# EAGLE board Fuel_Cell_Controller (EAGLE 9.6.2)
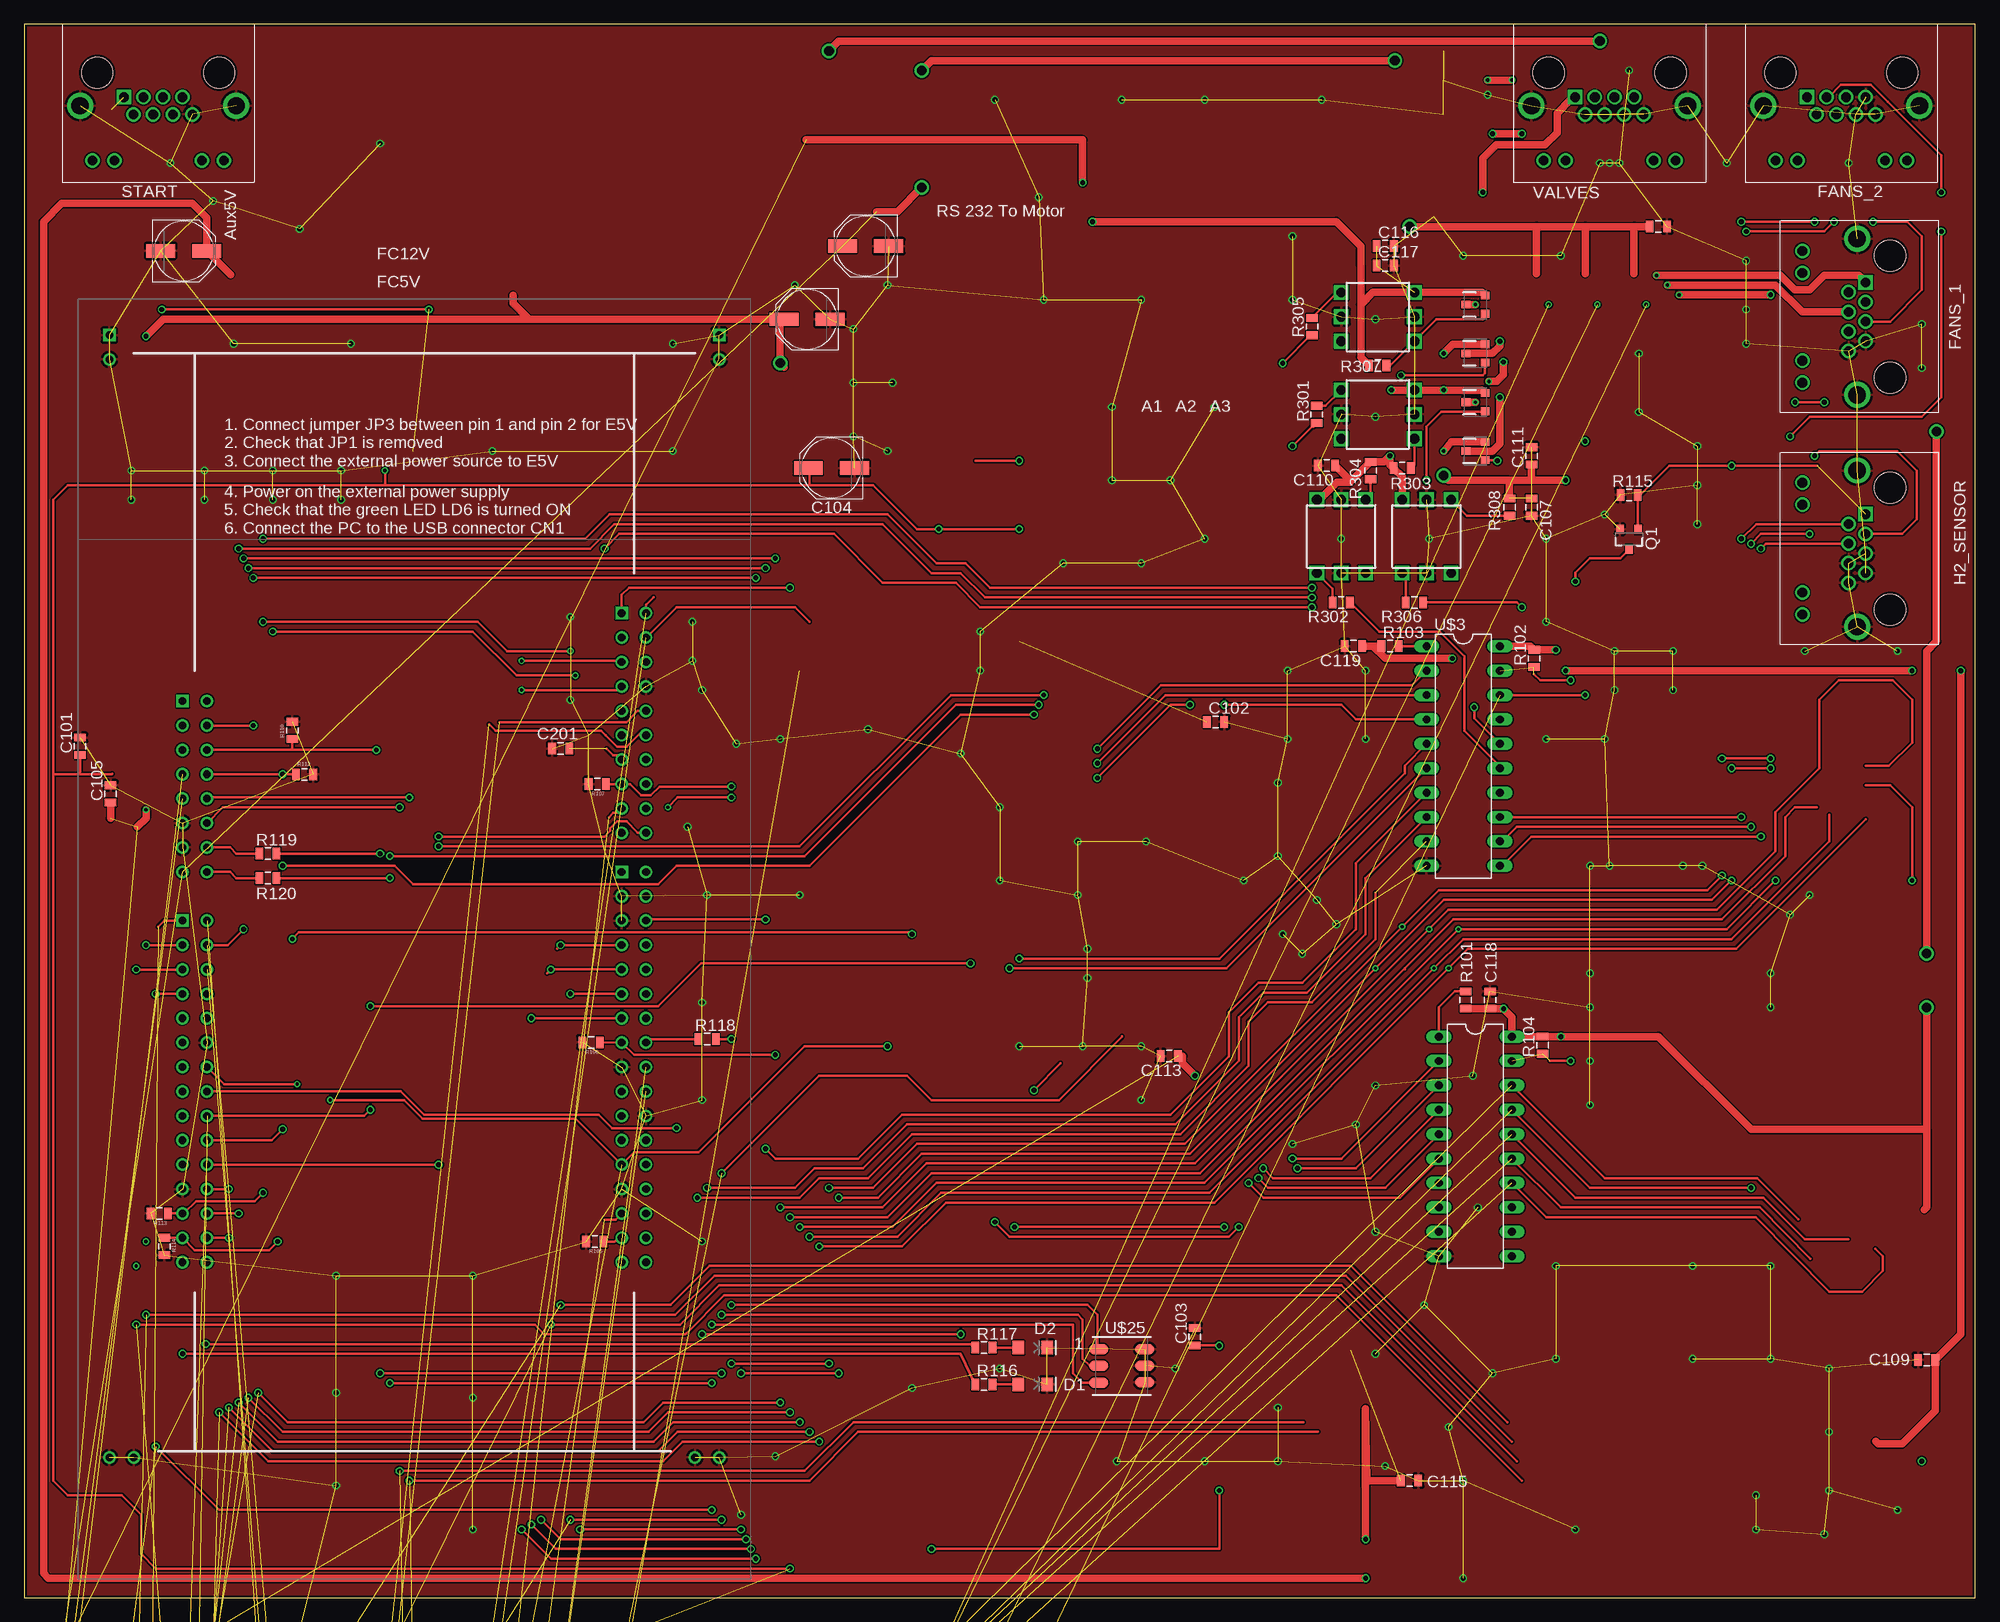
[diagram p0: board, top side]
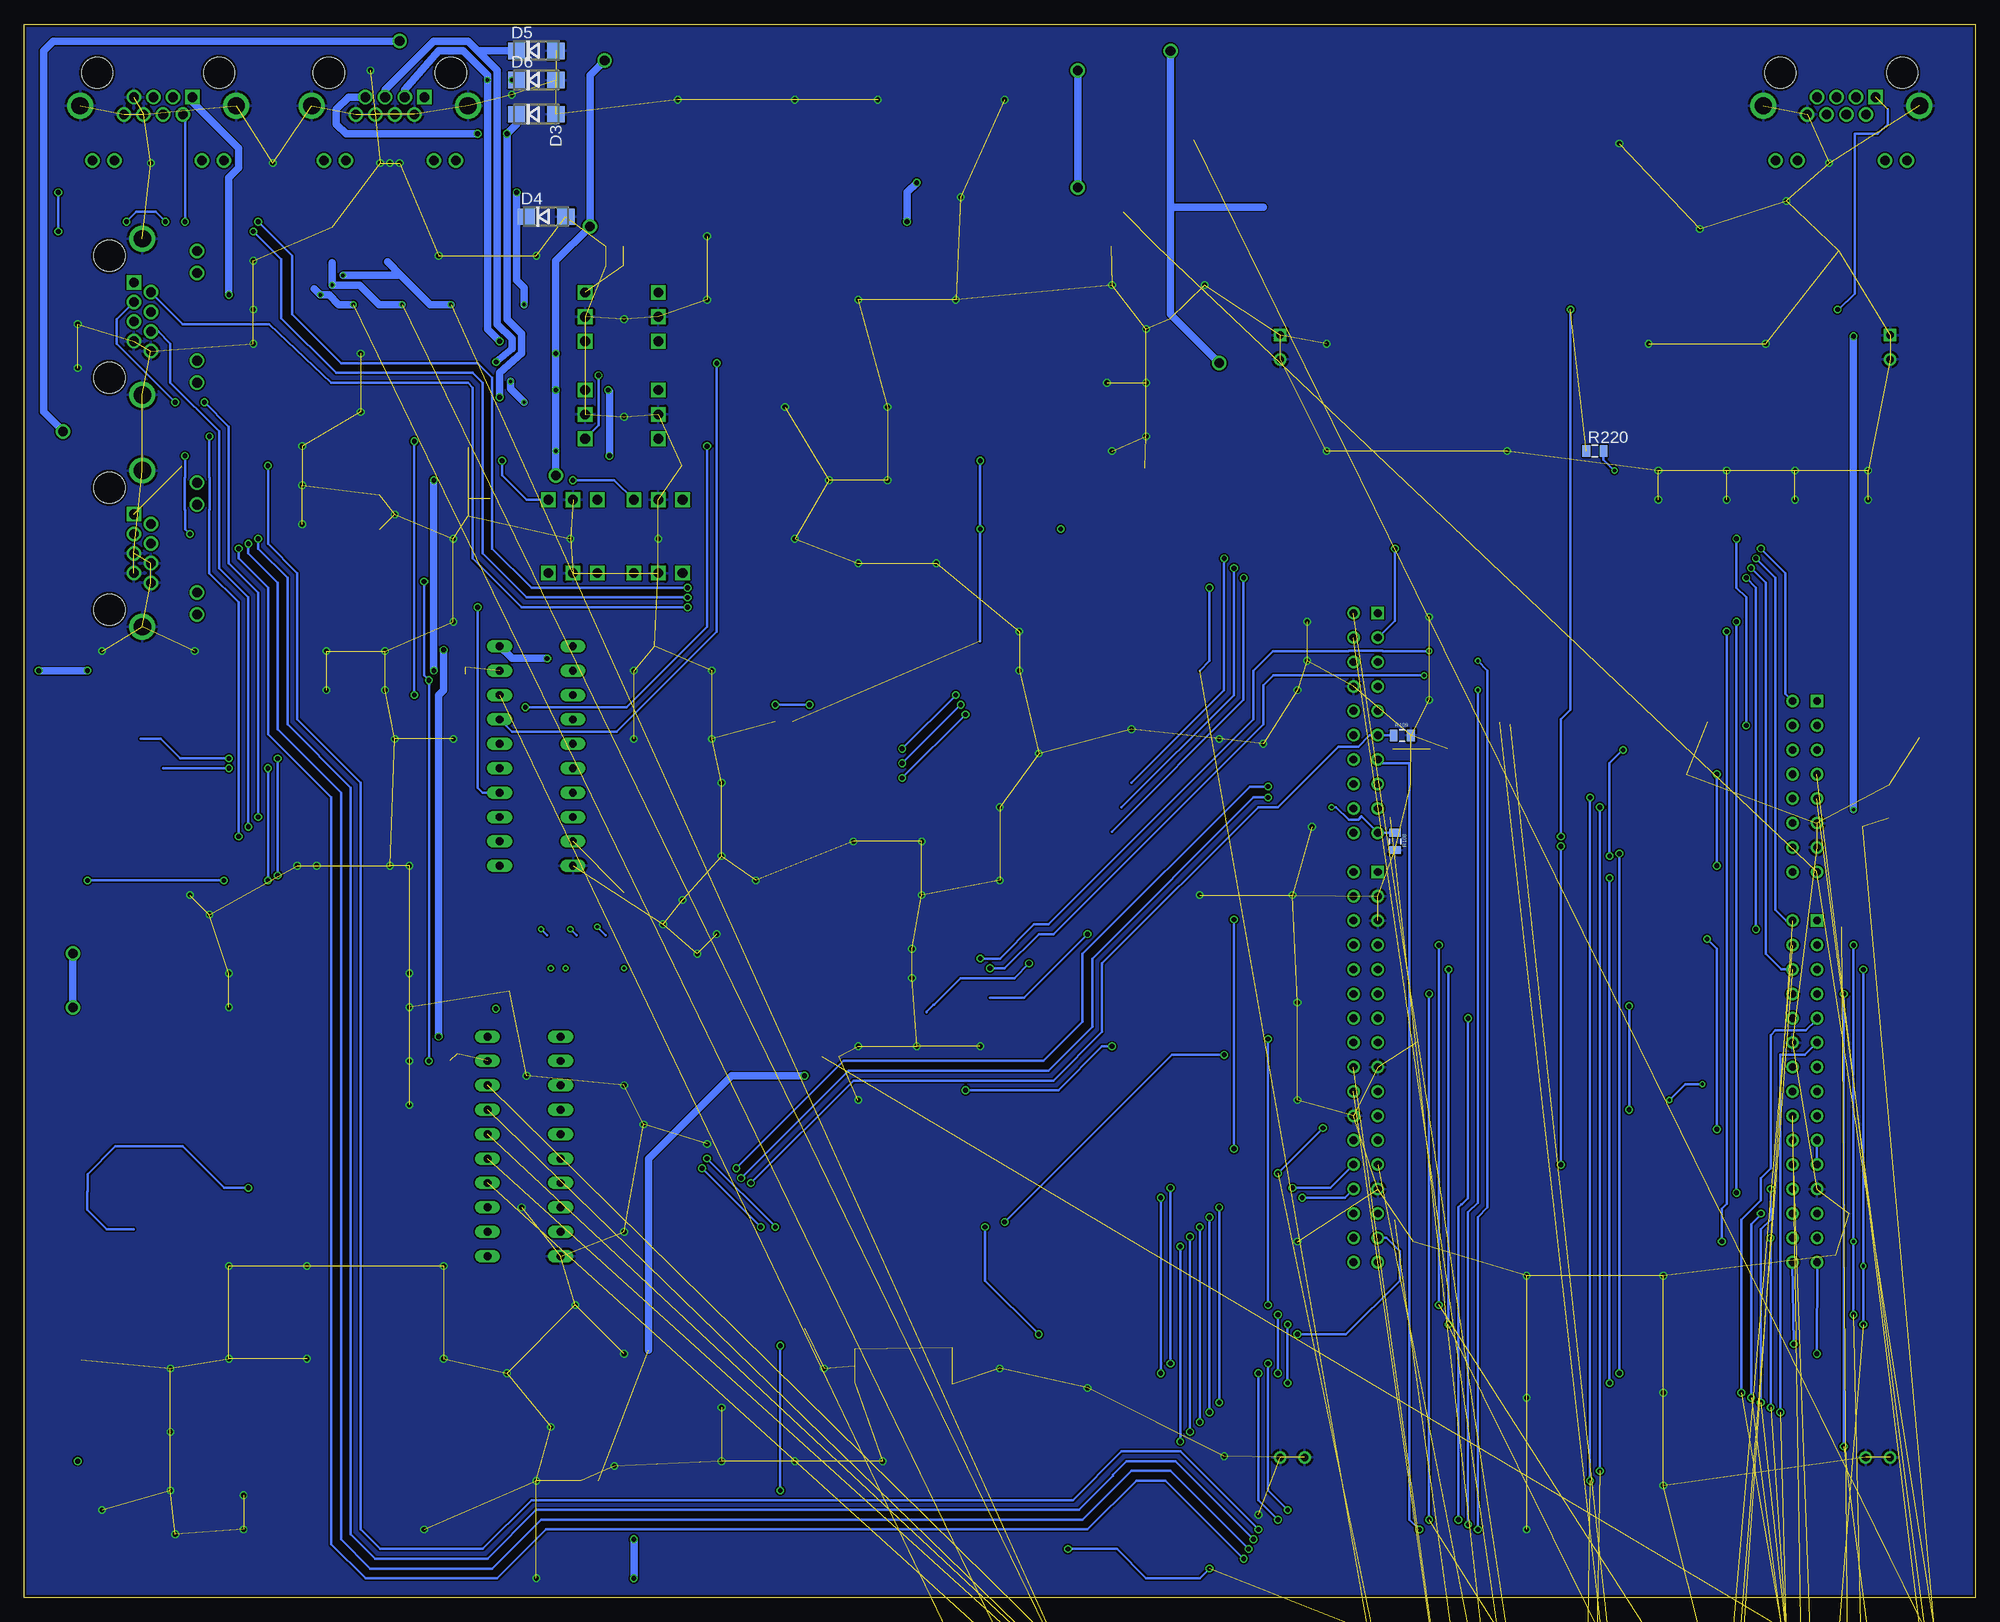
[diagram p1: board, bottom side, seen from below]

Size 203.2 x 163.83 mm. Coordinates in mm from the lower left corner, seen from the top.
Outline: 0,0 203.2,0 203.2,163.83 0,163.83 0,0
Copper layers (1+2+15+16): Top 0.035mm / dielectric 0.75mm / Route2 0.035mm / dielectric 0.75mm / Route15 0.035mm / dielectric 0.75mm / Bottom 0.035mm
Design rules "SeeedStudio_2layer_DRU_no_angle_20140221 *": minimum track width 6mil, minimum drill 12mil, track to track 6mil, track to pad 6mil, pad to pad 6mil, via to via 6mil, smd to smd 0mil, copper to edge 10mil, drill to drill 10mil, minimum pad ring 10mil, minimum via ring 6mil, stop-mask expansion 2mil, vias tented up to drill 100mil, thermal gap 10mil

## Footprints (pad centres in the part's own frame; a part is rotated, then mirrored left to right if it is on the bottom)
TE_6-PIN = drill 1.5 square: 1 4.14,11.48; 2 0,11.48; 3 -4.14,11.48; 4 4.14,7.34; 5 0,7.34; 6 -4.14,7.34 | hole 3.91: 0,0
0805 = smd 0.8 x 1.2: 1 -0.9,0; 2 0.9,0
PANASONIC_D = smd 3 x 1.4: + 2.4,0; - -2.4,0
A122645-ND = drill 1 square: P$1 3.58,2.54 | drill 1: P$2 2.56,4.32; P$3 1.54,2.54; P$4 0.52,4.32; P$5 -0.5,2.54; P$6 -1.52,4.32; P$7 -2.54,2.54; P$8 -3.56,4.32; P$9 -6.86,9.14; P$10 -4.57,9.14; P$11 4.57,9.14; P$12 6.86,9.14 | drill 1.8: P$13 -8.13,3.43; P$14 8.13,3.43 | hole 3.25: -6.35,0; 6.35,0
LED-1206 = smd 1.2 x 1.4: A -1.5,0; C 1.5,0
DO214AC = smd 1.8 x 1.7: A 2.05,0; C -2.05,0
SOT23 = smd 1 x 1.4: A1 -0.95,-1.1; A2 0.95,-1.1; C 0,1.1
DO-204AC = drill 0.95: ANODE 0,0; CATHODE 9.6,0
3,6-PAD = drill 3.6 pad 5.842: B3,6 0,0
SO16L = smd 0.66 x 2.032: 1 -4.445,-4.902; 2 -3.175,-4.902; 3 -1.905,-4.902; 4 -0.635,-4.902; 5 0.635,-4.902; 6 1.905,-4.902; 7 3.175,-4.902; 8 4.445,-4.902; 9 4.445,4.902; 10 3.175,4.902; 11 1.905,4.902; 12 0.635,4.902; 13 -0.635,4.902; 14 -1.905,4.902; 15 -3.175,4.902; 16 -4.445,4.902
1X06BLUETOOTH = drill 1.016 pad 1.88: 1 43.18,1.905; 2 43.18,4.445; 3 43.18,6.985; 4 43.18,9.525; 5 43.18,12.065; 6 43.18,14.605
JP1 = drill 0.914 long: 1 0,-1.27; 2 0,1.27
CHIP-LED0805 = smd 1.2 x 1.2: A 0,-1.05; C 0,1.05
DIL14 = drill 0.813 long: 1 -7.62,-3.81; 2 -5.08,-3.81; 3 -2.54,-3.81; 4 0,-3.81; 5 2.54,-3.81; 6 5.08,-3.81; 7 7.62,-3.81; 8 7.62,3.81; 9 5.08,3.81; 10 2.54,3.81; 11 0,3.81; 12 -2.54,3.81; 13 -5.08,3.81; 14 -7.62,3.81
SOT23-3 = smd 0.8 x 0.9: 1 -0.95,-1; 2 0.95,-1; 3 0,1.1
R0805 = smd 1.3 x 1.5: 1 -0.95,0; 2 0.95,0
0402 = smd 0.85 x 0.9: 1 -0.58,0; 2 0.58,0
1X07-SHT31-DIS = drill 1.016 long: 1 -7.62,0; 2 -5.08,0; 3 -2.54,0; 4 0,0; 5 2.54,0; 6 5.08,0; 7 7.62,0 | hole 2.54: -6.35,7.62; 6.35,7.62
NUCLEO-F746ZG = drill 0.8: 3V3 -24.13,17.151; 5V -24.13,14.611; AGND 21.59,4.451; AVDD1 24.13,28.835; GND1 -24.13,12.071; GND2 -24.13,9.531; GND4 -31.75,60.33; GND6 31.75,60.33; GND7 31.75,-53.969; GND8 29.21,-53.969; GND9 -29.21,-53.969; GND10 -31.75,-53.969; GND11 -24.13,-26.029; GND12 -21.59,-10.789; GND13 24.13,26.295; GND14 21.59,-13.329; GND15 21.59,-26.029; GND16 21.59,1.911; GND17 24.13,-18.409; IOREF -24.13,22.231; NC2 -24.13,-13.329; NRST -24.13,19.691; PA_0 21.59,-28.569; PA_4 21.59,13.595; PA_5 24.13,23.755; PA_6 24.13,21.215; PA_7A -24.13,-15.869; PA_7B 24.13,18.675; PA_15 21.59,23.755; PB_0 21.59,-31.109; PB_1 21.59,-0.629; PB_2 21.59,-10.789; PB_3 21.59,16.135; PB_4 21.59,11.055; PB_5 21.59,18.675; PB_6 21.59,-8.249; PB_8 24.13,33.915; PB_9 24.13,31.375; PB_10 24.13,-31.109; PB_11 24.13,-33.649; PB_12 21.59,26.295; PB_13 21.59,28.835; PB_15 21.59,31.375; PC_0 -24.13,-0.629; PC_2 21.59,-3.169; PC_3 -24.13,-3.169; PC_7 21.59,21.215; PC_8 -21.59,24.771; PC_9 -21.59,22.231; PC_10 -21.59,19.691; PC_11 -21.59,17.151; PC_12 -21.59,14.611; PD_0 -24.13,-28.569; PD_1 -24.13,-31.109; PD_2 -21.59,12.071; PD_3 -21.59,-8.249; PD_4 -21.59,-5.709; PD_5 -21.59,-3.169; PD_6 -21.59,-0.629; PD_7 -21.59,1.911; PD_11 21.59,-20.949; PD_12 21.59,-18.409; PD_13 21.59,-15.869; PD_14 24.13,16.135; PD_15 24.13,13.595; PE_0 21.59,-33.649; PE_2A -21.59,-13.329; PE_2B 21.59,-23.489; PE_3 -21.59,-23.489; PE_4 -21.59,-15.869; PE_5 -21.59,-18.409; PE_6 -21.59,-20.949; PE_7 24.13,-15.869; PE_8 24.13,-13.329; PE_9 24.13,4.451; PE_10 24.13,-20.949; PE_11 24.13,1.911; PE_12 24.13,-23.489; PE_13 24.13,-3.169; PE_14 24.13,-26.029; PE_15 24.13,-28.569; PF_2 -24.13,-18.409; PF_3 -24.13,-5.709; PF_4 21.59,-5.709; PF_5 -24.13,-8.249; PF_7 -21.59,-28.569; PF_8 -21.59,-26.029; PF_9 -21.59,-31.109; PF_10 -24.13,-10.789; PF_12 24.13,11.055; PF_13 24.13,6.991; PF_14 24.13,-0.629; PF_15 24.13,-5.709; PG_0 -24.13,-33.649; PG_1 -21.59,-33.649; PG_2 -21.59,9.531; PG_3 -21.59,6.991; PG_9 24.13,-10.789; PG_14 24.13,-8.249; PH_0 -24.13,-23.489; PH_1 -24.13,-20.949; VIN -24.13,6.991 | drill 0.8 square: AVDD2 21.59,6.991; GND3 -31.75,62.87; GND5 31.75,62.87; NC1 -24.13,24.771; PA_3 -24.13,1.911; PC_6 21.59,33.915
DIL20 = drill 0.813 long: 1 -11.43,-3.81; 2 -8.89,-3.81; 3 -6.35,-3.81; 4 -3.81,-3.81; 5 -1.27,-3.81; 6 1.27,-3.81; 7 3.81,-3.81; 8 6.35,-3.81; 9 8.89,-3.81; 10 11.43,-3.81; 11 11.43,3.81; 12 8.89,3.81; 13 6.35,3.81; 14 3.81,3.81; 15 1.27,3.81; 16 -1.27,3.81; 17 -3.81,3.81; 18 -6.35,3.81; 19 -8.89,3.81; 20 -11.43,3.81
OPENLOG = drill 0.8: P$1 -6.35,-8.255; P$2 -3.81,-8.255; P$3 -1.27,-8.255; P$4 1.27,-8.255; P$5 3.81,-8.255; P$6 6.35,-8.255
H11L1 = drill 1.016 square: 3 -3.81,-2.54; ANODE -3.81,2.54; CATHODE -3.81,0; GND 3.81,0; VCC 3.81,2.54; VO 3.81,-2.54
SOT143_AVAGO = smd 1 x 0.7: GND -0.75,-1 | smd 0.6 x 0.7: IO1 0.95,-1; IO3 -0.95,1; VDD 0.95,1
DMP3056L-7 = smd 0.8 x 0.9: D 0,1; G -0.95,-1; S 0.95,-1
5060BRG4 = smd 2 x 1.1: 1 2.4,-1.75; 2 2.4,0; 3 2.4,1.75; 4 -2.4,1.7; 5 -2.4,0; 6 -2.4,-1.75
1X08OLED = drill 1.016 long: P$1 -8.89,25.4; P$2 -6.35,25.4; P$3 -3.81,25.4; P$4 -1.27,25.4; P$5 1.27,25.4; P$6 3.81,25.4; P$7 6.35,25.4; P$8 8.89,25.4 | hole 2.54: -16.002,3.048; 16.002,3.048; 16.002,25.4; -16.002,25.4

## Placement (x,y rotation side)
AUX_PWR1  TE_6-PIN  [TE_6-PIN]  7.75,-130.05 0 top  (outside the outline)
C101  0.1µF  [0805]  5.84,88.65 90 top
C102  0.1µF  [0805]  124.08,91.19 0 top
C103  0.1µF  [0805]  121.92,27.18 90 top
C104  1µF  [PANASONIC_D]  84.07,117.6 180 top
C105  1µF  [0805]  9.02,83.69 90 top
C106  1µF  [PANASONIC_D]  81.53,133.1 180 top
C107  10µF  [0805]  156.97,113.54 270 top
C108  10µF  [0805]  170.18,142.75 0 top
C109  10µF  [0805]  198.12,24.77 180 top
C110  10µF  [0805]  135.64,117.86 180 top
C111  10µF  [0805]  156.97,118.87 90 top
C112  10µF  [PANASONIC_D]  87.63,140.72 180 top
C113  1µF  [0805]  119.25,56.39 180 top
C114  1µF  [PANASONIC_D]  16.64,140.21 0 top
C115  1µF  [0805]  144.27,12.19 0 top
C116  10µF  [0805]  141.73,140.72 0 top
C117  10µF  [0805]  141.73,138.68 0 top
C118  0.1µF  [0805]  152.65,62.23 90 top
C119  0.1µF  [0805]  138.43,99.06 180 top
C120  1µF  [0805]  1.27,-357.5 0 top  (outside the outline)
C121  1µF  [0805]  1.27,-360.93 0 top  (outside the outline)
C122  1µF  [0805]  1.27,-364.36 0 top  (outside the outline)
C201  1µF  [0805]  55.88,88.39 180 top
C301  [0805]  6.73,-318.01 0 top  (outside the outline)
C302  [0805]  3.94,-318.01 0 top  (outside the outline)
C303  [0805]  1.14,-318.01 0 top  (outside the outline)
C304  [0805]  8.76,-342.14 0 top  (outside the outline)
C305  [0805]  11.56,-342.14 0 top  (outside the outline)
C306  [0805]  14.35,-342.14 0 top  (outside the outline)
CAN  ETHERNET  [A122645-ND]  11.68,-379.6 0 top  (outside the outline)
D1  RED  [LED-1206]  105.03,22.23 0 top
D2  YELLOW  [LED-1206]  105.03,26.04 0 top
D3  [DO214AC]  149.86,154.43 0 bottom
D4  [DO214AC]  148.84,143.76 0 bottom
D5  [DO214AC]  149.86,161.04 0 bottom
D6  [DO214AC]  149.86,157.99 0 bottom
D201  [DO214AC]  13.59,-197.1 0 top  (outside the outline)
D202  [DO214AC]  2.92,-202.44 0 top  (outside the outline)
D203  [DO214AC]  9.14,-202.44 0 top  (outside the outline)
D301  641-1198-1-ND  [SOT23]  28.45,-291.97 0 top  (outside the outline)
D302  641-1198-1-ND  [SOT23]  41.78,-291.97 0 top  (outside the outline)
D303  P6KE15A-E3/54GICT-ND  [DO-204AC]  19.81,-299.08 0 top  (outside the outline)
FANS_1  ETHERNET  [A122645-ND]  194.31,133.35 90 top
FANS_2  ETHERNET  [A122645-ND]  189.23,158.75 180 top
FC_PWR1  TE_6-PIN  [TE_6-PIN]  7.75,-152.53 0 top  (outside the outline)
H2_SENSOR  ETHERNET  [A122645-ND]  194.31,109.22 90 top
H9  MOUNT-PAD-ROUND3.6  [3,6-PAD]  22.1,-277.5 0 top  (outside the outline)
H10  MOUNT-PAD-ROUND3.6  [3,6-PAD]  30.86,-277.5 0 top  (outside the outline)
H11  MOUNT-PAD-ROUND3.6  [3,6-PAD]  39.62,-277.5 0 top  (outside the outline)
H12  MOUNT-PAD-ROUND3.6  [3,6-PAD]  48.39,-277.5 0 top  (outside the outline)
H13  MOUNT-PAD-ROUND3.6  [3,6-PAD]  57.15,-277.5 0 top  (outside the outline)
H14  MOUNT-PAD-ROUND3.6  [3,6-PAD]  4.06,-292.74 0 top  (outside the outline)
H15  MOUNT-PAD-ROUND3.6  [3,6-PAD]  12.83,-292.74 0 top  (outside the outline)
H16  MOUNT-PAD-ROUND3.6  [3,6-PAD]  21.59,-292.74 0 top  (outside the outline)
IC1  MAX232ECWE  [SO16L]  7.11,-350.01 0 top  (outside the outline)
J2  BLUETOOTH  [1X06BLUETOOTH]  0.76,-272.03 0 top  (outside the outline)
JP1  [JP1]  3.17,-8.76 0 top  (outside the outline)
JP2  [JP1]  3.17,-14.48 0 top  (outside the outline)
JP3  [JP1]  3.17,-20.19 0 top  (outside the outline)
JP4  [JP1]  3.17,-25.91 0 top  (outside the outline)
LED1  [CHIP-LED0805]  31.5,-143.89 0 top  (outside the outline)
LED2  [CHIP-LED0805]  27.3,-144.91 0 top  (outside the outline)
LED3  [CHIP-LED0805]  23.11,-145.16 0 top  (outside the outline)
LED4  [CHIP-LED0805]  18.92,-146.18 0 top  (outside the outline)
LP_FILTER_OP_AMP1  TLV2404TLV2404  [DIL14]  10.79,-335.41 0 top  (outside the outline)
PRESSURE1  ETHERNET  [A122645-ND]  11.68,-42.29 0 top  (outside the outline)
Q1  5.8A/30V/35mΩ  [SOT23-3]  167.13,110.24 180 top
R29  10kΩ  [0805]  1.27,-204.98 0 top  (outside the outline)
R101  1kΩ  [0805]  150.11,62.23 90 top
R102  10kΩ  [0805]  157.23,97.79 90 top
R103  1kΩ  [0805]  142.24,99.06 0 top
R104  10kΩ  [0805]  158.12,57.53 90 top
R105  10kΩ  [0805]  59.44,37.08 180 top
R106  10kΩ  [0805]  59.04,57.81 180 top
R107  10kΩ  [0805]  59.69,84.71 180 top
R108  10kΩ  [0805]  60.45,78.74 270 bottom
R109  10kΩ  [0805]  59.69,89.79 0 bottom
R110  10kΩ  [0805]  27.94,90.3 90 top
R112  10kΩ  [0805]  29.21,85.72 0 top
R113  10kΩ  [0805]  14.1,40.01 180 top
R114  10kΩ  [0805]  14.61,36.58 270 top
R115  10kΩ  [0805]  167.13,114.81 0 top
R116  324Ω  [0805]  99.95,22.23 0 top
R117  324Ω  [0805]  99.95,26.04 0 top
R118  324Ω  [0805]  71.12,58.17 0 top
R119  324Ω  [0805]  25.4,77.47 0 top
R120  324Ω  [0805]  25.4,74.93 0 top
R201  604Ω  [R0805]  1.78,-161.04 0 top  (outside the outline)
R202  604Ω  [R0805]  8,-161.04 0 top  (outside the outline)
R203  324Ω  [R0805]  14.22,-161.04 0 top  (outside the outline)
R204  324Ω  [R0805]  20.45,-161.04 0 top  (outside the outline)
R205  10kΩ  [0805]  1.27,-48.9 0 top  (outside the outline)
R206  10kΩ  [0805]  4.19,-48.9 0 top  (outside the outline)
R207  10kΩ  [0805]  7.11,-48.9 0 top  (outside the outline)
R208  10kΩ  [0805]  10.03,-48.9 0 top  (outside the outline)
R209  10kΩ  [0805]  12.95,-48.9 0 top  (outside the outline)
R210  10kΩ  [0805]  15.88,-48.9 0 top  (outside the outline)
R211  10kΩ  [0805]  18.8,-48.9 0 top  (outside the outline)
R212  10kΩ  [0805]  1.27,-52.32 0 top  (outside the outline)
R213  100kΩ  [0805]  18.8,-74.17 0 top  (outside the outline)
R214  100kΩ  [0805]  15.88,-74.17 0 top  (outside the outline)
R215  100kΩ  [0805]  12.95,-74.17 0 top  (outside the outline)
R216  100kΩ  [0805]  10.03,-74.17 0 top  (outside the outline)
R217  100kΩ  [0805]  7.11,-74.17 0 top  (outside the outline)
R218  100kΩ  [0805]  4.19,-74.17 0 top  (outside the outline)
R219  100kΩ  [0805]  1.27,-74.17 0 top  (outside the outline)
R220  1kΩ  [0805]  39.62,119.38 0 bottom
R221  470Ω  [0805]  13.72,-200.66 0 top  (outside the outline)
R301  470Ω  [0805]  134.62,123.19 90 top
R302  470Ω  [0805]  137.16,103.63 180 top
R303  10kΩ  [0805]  143.51,117.6 0 top
R304  10kΩ  [0805]  140.21,117.35 270 top
R305  470Ω  [0805]  134.11,132.33 90 top
R306  470Ω  [0805]  144.78,103.63 180 top
R307  10kΩ  [0805]  140.97,128.27 0 top
R308  10kΩ  [0805]  154.69,113.54 270 top
R309  [R0805]  1.78,-307.09 0 top  (outside the outline)
R310  [R0805]  5.97,-307.09 0 top  (outside the outline)
R311  [R0805]  1.78,-311.28 0 top  (outside the outline)
R312  [R0805]  5.97,-311.28 0 top  (outside the outline)
R313  [R0805]  1.78,-315.47 0 top  (outside the outline)
R314  [R0805]  5.97,-315.47 0 top  (outside the outline)
R315  [0402]  1.02,-342.39 0 top  (outside the outline)
R316  [0402]  3.56,-342.39 0 top  (outside the outline)
R317  [0402]  6.1,-342.39 0 top  (outside the outline)
RELAYBOARD3  ETHERNET  [A122645-ND]  11.68,-89.41 0 top  (outside the outline)
RELAYBOARD4  ETHERNET  [A122645-ND]  11.68,-107.82 0 top  (outside the outline)
SHTSENSOR1  SHT31-DIS  [1X07-SHT31-DIS]  8.64,-285.62 0 top  (outside the outline)
START  ETHERNET  [A122645-ND]  13.97,158.75 180 top
TEMPERATURE1  ETHERNET  [A122645-ND]  11.68,-177.42 0 top  (outside the outline)
U$1  NUCLEO-F746ZGNUCLEO-F746ZG  [NUCLEO-F746ZG]  40.64,68.58 0 top
U$3  SN74LVC245AN  [DIL20]  149.86,87.63 270 top
U$4  OPENLOG  [OPENLOG]  45.72,-216.53 0 top  (outside the outline)
U$5  SN74LVC245AN  [DIL20]  151.13,46.99 270 top
U$6  H11L1H11L1  [H11L1]  140.97,133.35 0 top
U$8  CD143A-SR3.3CT-ND  [SOT143_AVAGO]  1.78,-300.61 0 top  (outside the outline)
U$10  H11L1H11L1  [H11L1]  5.21,-188.47 0 top  (outside the outline)
U$11  H11L1H11L1  [H11L1]  140.97,123.19 0 top
U$12  DMP3056L-7DMP3056L-7  [DMP3056L-7]  151.13,134.62 90 top
U$13  DMP3056L-7DMP3056L-7  [DMP3056L-7]  151.13,129.54 90 top
U$14  H11L1H11L1  [H11L1]  137.16,110.49 90 top
U$15  DMP3056L-7DMP3056L-7  [DMP3056L-7]  151.13,124.46 90 top
U$16  H11L1H11L1  [H11L1]  146.05,110.49 90 top
U$17  DMP3056L-7DMP3056L-7  [DMP3056L-7]  151.13,119.38 90 top
U$19  DMP3056L-7DMP3056L-7  [DMP3056L-7]  14.22,-186.31 0 top  (outside the outline)
U$23  DMP3056L-7DMP3056L-7  [DMP3056L-7]  2.79,-197.74 0 top  (outside the outline)
U$24  DMP3056L-7DMP3056L-7  [DMP3056L-7]  8.13,-197.74 0 top  (outside the outline)
U$25  5060BRG45060BRG4  [5060BRG4]  114.3,24.13 180 top
U$27  ADAFRUITOLED  [1X08OLED]  18.8,-235.46 0 top  (outside the outline)
VALVES  ETHERNET  [A122645-ND]  165.1,158.75 180 top

## Library data of the parts
AUX_PWR1 FC_PWR1 = EcoCar-Connectors
C101-C103 C105 C107-C111 C113 C115-C117 C120-C122 C301-C306 = SparkFun-Capacitors
C104 C106 C112 C114 = 100uF_Cap
C118 C119 C201 R29 R101-R110 R112-R120 R205-R221 R301-R308 = SparkFun-Passives
CAN FANS_1 FANS_2 H2_SENSOR PRESSURE1 RELAYBOARD3 RELAYBOARD4 START TEMPERATURE1 VALVES = ETHERNET
D1 D2 = SparkFun-LED
D3-D6 D201-D203 = diode
D301 D302 = 5V TVS
D303 = 12V TVS
H9-H16 = holes
IC1 = maxim; MF: MAXIM; MPN: MAX232ECWE+; OC_FARNELL: 9724435; OC_NEWARK: 67K4440
J2 LP_FILTER_OP_AMP1 SHTSENSOR1 U$1 U$3 U$5 U$6 U$10-U$17 U$19 U$23-U$25 U$27 = FCC_parts
JP1-JP4 = jumper
LED1-LED4 = led
Q1 = n-mos switch; PROD_ID: TRANS-12988
R201-R204 R309-R314 = resistor
R315-R317 = SparkFun-Resistors
U$4 = openlog
U$8 = 3_3V TVS

## Nets
_CAP_CURR: R313.1 RELAYBOARD4.P$6
_CAP_RELAY: R106.1 U$1.PB_2 U$5.3
_CAP_VOLT: C306.1 R317.2 U$1.PA_4
_CHARGE_RELAY: R108.1 U$1.PB_4 U$5.5
_FANS_SWITCH_ALL: U$1.PE_3 U$3.2
_FC_CURR: R309.1 RELAYBOARD4.P$4
_FC_VOLT: C304.1 R315.1 U$1.PA_0
_FCC_RELAY: R105.1 U$1.PB_0 U$5.2
_MOTOR_CURR: R311.1 RELAYBOARD4.P$5
_MOTOR_RELAY: R107.1 U$1.PB_3 U$5.4
_MOTOR_VOLT: C305.1 R316.1 U$1.PA_3
_OUTPUT_1: R113.1 U$1.PD_0 U$3.5
_OUTPUT_2: R114.1 U$1.PD_1 U$3.6
_PRESSURE_1: PRESSURE1.P$2 R205.2
_PRESSURE_2: PRESSURE1.P$3 R207.2
_PRESSURE_3: PRESSURE1.P$4 R209.2
_PRESSURE_4: PRESSURE1.P$5 R211.2
_PURGE_VALVE: R112.1 U$1.PC_11 U$3.4
_PWM_1: U$1.PE_11 U$3.7
_PWM_2: U$1.PE_12 U$3.8
_PWM_3: U$1.PE_14 U$3.9
_START: R220.1 START.P$1 U$1.PF_12
_START_RELAY: R109.1 U$1.PC_7 U$5.6
_SUPPLY_VALVE: R110.1 U$1.PC_10 U$3.3
ALARM_LED: R116.1 U$1.PG_0
AUX5V: AUX_PWR1.4 AUX_PWR1.6 C113.1 C114.+ C115.1 D302.C JP2.2 R203.2
AUX12V: AUX_PWR1.1 AUX_PWR1.3 C116.1 C117.1 JP1.2 R204.2 R307.1 U$6.VCC U$12.S
CAP_CURR: C303.1 R313.2 R314.1
CAP_RELAY: RELAYBOARD3.P$3 U$5.17
CAP_VOLT: LP_FILTER_OP_AMP1.10 RELAYBOARD4.P$3
CHARGE_RELAY: RELAYBOARD3.P$6 U$5.15
DEBUG_LED: R117.1 U$1.PG_1
ESTOP_1: H2_SENSOR.P$3 U$1.PB_12
ESTOP_2: H2_SENSOR.P$4 U$1.PB_13
FAN1_PWR: D201.C FANS_1.P$1 U$19.D
FAN2_PWR: D202.C FANS_1.P$4 U$23.D
FAN3_PWR: D203.C FANS_2.P$1 U$24.D
FANS_GATE: R29.2 U$10.VO U$19.G U$23.G U$24.G
FANS_SWITCH_ALL: R221.1 U$3.18
FC3V3: C101.1 C102.1 C103.1 C104.+ JP4.1 R213.2 R214.2 R215.2 R216.1 R217.1 R218.1 R219.1 R220.2 SHTSENSOR1.1 SHTSENSOR1.5 U$8.VDD U$27.P$6
FC5V: C105.1 C106.+ C118.1 C119.1 C122.2 D301.C FC_PWR1.4 FC_PWR1.6 IC1.2 J2.3 JP2.1 JP3.1 LP_FILTER_OP_AMP1.4 R101.1 R102.2 R103.1 R104.2 R201.2 U$3.20 U$4.P$4 U$5.20 U$27.P$7
FC12V: C107.1 C108.1 C109.1 C110.1 C111.1 C112.+ D303.CATHODE FC_PWR1.1 FC_PWR1.3 JP1.1 PRESSURE1.P$1 R29.1 R202.2 R303.1 R304.1 R308.1 U$1.VIN U$10.VCC U$11.VCC U$13.S U$14.VCC U$15.S U$16.VCC U$17.S U$19.S U$23.S U$24.S
FC_CURR: C301.1 R309.2 R310.1 U$1.PA_5
FC_VOLT: LP_FILTER_OP_AMP1.3 RELAYBOARD4.P$1
FCC_RELAY: RELAYBOARD3.P$2 U$5.18
FCTEMP_1: R219.2 TEMPERATURE1.P$1 U$1.PF_3
FCTEMP_2: R218.2 TEMPERATURE1.P$2 U$1.PF_4
FROM_BLUE: J2.4 U$1.PD_2
FROM_OPEN: U$1.PD_6 U$4.P$3
GND: AUX_PWR1.2 AUX_PWR1.5 C101.2 C102.2 C103.2 C104.- C105.2 C106.- C107.2 C108.2 C109.2 C110.2 C111.2 C112.- C113.2 C114.- C115.2 C116.2 C117.2 C118.2 C119.2 C122.1 C201.2 C301.2 C302.2 C303.2 C304.2 C305.2 C306.2 CAN.P$4 CAN.P$5 CAN.P$13 CAN.P$14 D1.C D2.C D3.A D4.A D5.A D6.A D201.A D202.A D203.A D301.A1 D301.A2 D302.A1 D302.A2 D303.ANODE FANS_1.P$7 FANS_1.P$8 FANS_1.P$13 FANS_1.P$14 FANS_2.P$6 FANS_2.P$7 FANS_2.P$8 FANS_2.P$13 FANS_2.P$14 FC_PWR1.2 FC_PWR1.5 H2_SENSOR.P$5 H2_SENSOR.P$6 H2_SENSOR.P$7 H2_SENSOR.P$8 H2_SENSOR.P$13 H2_SENSOR.P$14 H9.B3,6 H10.B3,6 H11.B3,6 H12.B3,6 H13.B3,6 H14.B3,6 H15.B3,6 H16.B3,6 IC1.6 IC1.15 J2.1 LED1.C LED2.C LED3.C LED4.C LP_FILTER_OP_AMP1.11 LP_FILTER_OP_AMP1.12 LP_FILTER_OP_AMP1.13 PRESSURE1.P$7 PRESSURE1.P$8 PRESSURE1.P$13 PRESSURE1.P$14 Q1.2 R105.2 R106.2 R107.2 R108.2 R109.2 R110.2 R112.2 R113.2 R114.2 R115.1 R206.1 R208.1 R210.1 R212.1 R310.2 R312.2 R314.2 RELAYBOARD3.P$7 RELAYBOARD3.P$8 RELAYBOARD3.P$13 RELAYBOARD3.P$14 RELAYBOARD4.P$8 RELAYBOARD4.P$13 RELAYBOARD4.P$14 SHTSENSOR1.2 START.P$8 START.P$13 START.P$14 TEMPERATURE1.P$8 TEMPERATURE1.P$13 TEMPERATURE1.P$14 U$1.AGND U$1.GND1 U$1.GND2 U$1.GND3 U$1.GND4 U$1.GND5 U$1.GND6 U$1.GND7 U$1.GND8 U$1.GND9 U$1.GND10 U$1.GND11 U$1.GND12 U$1.GND13 U$1.GND14 U$1.GND15 U$1.GND16 U$1.GND17 U$3.10 U$4.P$5 U$4.P$6 U$5.10 U$6.CATHODE U$6.GND U$8.GND U$10.CATHODE U$10.GND U$11.CATHODE U$11.GND U$14.CATHODE U$14.GND U$16.CATHODE U$16.GND U$25.4 U$25.5 U$25.6 U$27.P$8 VALVES.P$2 VALVES.P$4 VALVES.P$6 VALVES.P$8 VALVES.P$13 VALVES.P$14
H2_OK: H2_SENSOR.P$2 U$1.PB_6
HUMID_RST: SHTSENSOR1.6 U$1.PC_6
I2C1_SCL: SHTSENSOR1.3 U$1.PB_8
I2C1_SDA: SHTSENSOR1.4 U$1.PB_9
INTERRUPT: U$1.PH_0 U$1.PH_1
MOTOR_CURR: C302.1 R311.2 R312.1 U$1.PA_6
MOTOR_RELAY: RELAYBOARD3.P$4 U$5.16
MOTOR_VOLT: LP_FILTER_OP_AMP1.5 RELAYBOARD4.P$2
N$1: LED1.A R201.1
N$2: R305.2 U$6.ANODE
N$3: LED2.A R202.1
N$4: LED3.A R203.1
N$5: LED4.A R204.1
N$6: RELAYBOARD4.P$12
N$7: R221.2 U$10.ANODE
N$8: LP_FILTER_OP_AMP1.1 LP_FILTER_OP_AMP1.2 R315.2
N$9: R301.2 U$11.ANODE
N$10: R103.2 U$3.1
N$11: R101.2 U$5.1
N$12: LP_FILTER_OP_AMP1.6 LP_FILTER_OP_AMP1.7 R316.2
N$13: R302.2 U$14.ANODE
N$14: R306.2 U$16.ANODE
N$15: LP_FILTER_OP_AMP1.8 LP_FILTER_OP_AMP1.9 R317.1
N$16: D1.A R116.2
N$17: D2.A R117.2
N$18: R118.2 U$25.1
N$19: R119.2 U$25.2
N$20: R120.2 U$25.3
N$21: C120.1 IC1.1
N$22: C120.2 IC1.3
N$23: C121.2 IC1.4
N$24: C121.1 IC1.5
OE*: Q1.3 R102.1 R104.1 U$3.19 U$5.19
OLED_CLK: U$1.PE_2A U$1.PE_2B U$27.P$2
OLED_MISO: U$1.PE_5 U$27.P$3
OLED_MOSI: U$1.PE_6 U$27.P$1
OLED_SEL: U$1.PE_4 U$27.P$5
OPEN_RST: U$1.PD_7 U$4.P$1
OUTPUT_1: R302.1 U$3.15
OUTPUT_1_ENET: D5.C U$15.D VALVES.P$5
OUTPUT_1_GATE: R304.2 U$14.VO U$15.G
OUTPUT_2: R306.1 U$3.14
OUTPUT_2_ENET: D3.C U$17.D VALVES.P$7
OUTPUT_2_GATE: R308.2 U$16.VO U$17.G
PRESSURE_1: R205.1 R206.2 U$1.PB_1
PRESSURE_2: R207.1 R208.2 U$1.PC_0
PRESSURE_3: R209.1 R210.2 U$1.PC_2
PRESSURE_4: R211.1 R212.2 U$1.PC_3
PURGE_VALVE: R301.1 U$3.16
PURGE_VALVE_ENET: D6.C U$13.D VALVES.P$3
PURGE_VALVE_GATE: R303.2 U$11.VO U$13.G
PWM_1: FANS_1.P$3 U$3.13
PWM_2: FANS_1.P$6 U$3.12
PWM_3: FANS_2.P$3 U$3.11
RUN_LED: R118.1 U$1.PG_9
RX_OUT_RS232: CAN.P$6 IC1.13
RX_OUT_TTL: IC1.12 U$1.PE_7
SHT31_ALERT: SHTSENSOR1.7
SHUT_LED: R119.1 U$1.PG_2
START_LED: R120.1 U$1.PG_3
START_RELAY: RELAYBOARD3.P$5 U$5.14
STOP: C201.1 H2_SENSOR.P$1 Q1.1 R115.2 U$1.PB_5
SUPPLY_VALVE: R305.1 U$3.17
SUPPLY_VALVE_ENET: D4.C U$12.D VALVES.P$1
SUPPLY_VALVE_GATE: R307.2 U$6.VO U$12.G
TACH_1: FANS_1.P$2 U$1.PB_15
TACH_2: FANS_1.P$5 U$1.PC_8
TACH_3: FANS_2.P$2 U$1.PC_9
TEMP_1: R217.2 TEMPERATURE1.P$3 U$1.PF_5
TEMP_2: R216.2 TEMPERATURE1.P$4 U$1.PF_7
TEMP_3: R215.1 TEMPERATURE1.P$5 U$1.PF_8
TEMP_4: R214.1 TEMPERATURE1.P$6 U$1.PF_9
TEMP_5: R213.1 TEMPERATURE1.P$7 U$1.PF_10
TO_BLUE: J2.5 U$1.PC_12
TO_JP3: JP3.2 U$1.5V
TO_JP4: JP4.2 U$1.3V3
TO_OPEN: U$1.PD_5 U$4.P$2
TX_OUT_RS232: CAN.P$3 IC1.14
TX_OUT_TTL: IC1.11 U$1.PE_8
VCC: IC1.16

## Tracks (layer width: path | path; a pad name or v marks a point on that pad's centre or on a via)
_CAP_CURR  (1 unrouted)
_CAP_RELAY  (via drill 0.5)
  Top 0.254: U$5.3 138.68,44.7 v132.59,44.7 | v126.49,38.61 125.48,37.59 102.62,37.59 v101.09,39.12 | v78.23,56.52 63.5,56.52 U$1.PB_2 R106.1
  Bottom 0.254: v132.59,44.7 v126.49,38.61 | v78.23,56.52 83.69,56.52 v101.09,39.12
_CAP_VOLT  (2 unrouted)
  Top 0.254: 60.9,81.28 61.36,81.74 61.79,81.74 U$1.PA_4
_CHARGE_RELAY  (via drill 0.35, 0.5)
  Top 0.254: U$5.5 141.73,42.67 129.54,42.67 v128.52,43.69 | v73.66,83.31 68.07,83.31 v67.06,82.3
  Bottom 0.254: v128.52,43.69 117.35,54.86 96.52,54.86 91.95,59.44 91.95,66.55 75.18,83.31 v73.66,83.31 | v67.06,82.3 66.57,82.3 65.26,80.99 64.28,80.99 63.93,81.33 U$1.PB_4 R108.1
_FANS_SWITCH_ALL  (via drill 0.5)
  Top 0.254: U$3.2 144.53,95 118.36,95 v111.76,88.39 | v106.17,93.98 96.52,93.98 80.77,78.23 v43.18,78.23 | v43.18,45.09 U$1.PE_3
  Bottom 0.254: v111.76,88.39 v106.17,93.98 | v43.18,78.23 v43.18,45.09
_FC_CURR  (1 unrouted)
_FC_VOLT  (2 unrouted)
  Top 0.254: U$1.PA_0 61.59,39.37 60.45,39.37
_FCC_RELAY  (via drill 0.5)
  Top 0.254: U$5.2 137.16,45.72 v132.08,45.72 | v97.54,27.43 v70.61,27.43 | v124.97,38.61 v103.12,38.61 | R105.1 61.47,37.08 U$1.PB_0
  Bottom 0.254: v132.08,45.72 v124.97,38.61 | v103.12,38.61 103.12,33.02 v97.54,27.43 | v70.61,27.43 65.53,27.43 59.94,33.02 59.94,36.07 61.35,37.47 U$1.PB_0
_MOTOR_CURR  (1 unrouted)
_MOTOR_RELAY  (via drill 0.5)
  Top 0.254: U$5.4 140.21,43.69 130.05,43.69 v129.03,44.7 | v73.66,84.45 66.19,84.45 65.26,83.53 64.28,83.53 63.09,84.72 U$1.PB_3 R107.1
  Bottom 0.254: v129.03,44.7 117.86,55.88 97.03,55.88 92.96,59.94 92.96,67.06 75.56,84.45 v73.66,84.45
_MOTOR_VOLT  (2 unrouted)
  Top 0.254: U$1.PA_3 14.61,70.49 13.97,69.85
_OUTPUT_1  (via drill 0.35, 0.5)
  Top 0.254: U$3.5 143.76,86.61 143.76,85.85 124.46,66.55 v103.63,66.55 | v24.89,42.16 24,41.27 17.91,41.27 16.64,40.01 | 16.64,40.01 U$1.PD_0 | v24.89,101.6 47.24,101.6 50.29,98.55 v56.9,98.55 | R113.1 16.64,40.01
  Bottom 0.254: v103.63,66.55 101.6,66.55 98.04,70.1 96.52,70.1 75.18,91.44 75.18,96.52 73.15,98.55 65.31,98.55 65.26,98.6 61.74,98.6 61.69,98.55 v56.9,98.55 | v24.89,101.6 v24.89,42.16
_OUTPUT_2  (via drill 0.35, 0.5)
  Top 0.254: U$3.6 125.22,65.53 v102.62,65.53 | v25.91,100.58 46.74,100.58 51.31,96.01 v57.4,96.01 | v26.42,37.08 25.53,36.2 17.79,36.2 U$1.PD_1 R114.1
  Bottom 0.254: v102.62,65.53 101.09,65.53 97.54,69.09 96.01,69.09 74.17,90.93 74.17,95 73.1,96.06 61.74,96.06 61.69,96.01 v57.4,96.01 | v25.91,100.58 25.91,41.02 26.42,40.51 v26.42,37.08
_PRESSURE_1  (1 unrouted)
_PRESSURE_2  (1 unrouted)
_PRESSURE_3  (1 unrouted)
_PRESSURE_4  (1 unrouted)
_PURGE_VALVE  (via drill 0.5)
  Top 0.254: U$3.4 138.68,91.44 137.16,92.96 v124.97,92.96 | v121.41,92.96 119.38,92.96 v111.76,85.34 | v105.16,91.95 97.54,91.95 81.79,76.2 67.94,76.2 66.04,74.3 40.51,74.3 38.61,76.2 v26.92,76.2 | U$1.PC_11 v26.92,85.72 R112.1
  Bottom 0.254: v124.97,92.96 v121.41,92.96 | v111.76,85.34 v105.16,91.95 | v26.92,76.2 v26.92,85.72
_PWM_1  (via drill 0.5)
  Top 0.254: U$3.7 138.68,76.45 138.68,69.6 133.1,64.01 128.52,64.01 125.48,60.96 125.48,56.39 119.38,50.29 91.44,50.29 86.87,45.72 78.23,45.72 v77.22,46.74 | v77.22,70.61 64.89,70.61 U$1.PE_11
  Bottom 0.254: v77.22,46.74 v77.22,70.61
_PWM_2  (via drill 0.5)
  Top 0.254: U$3.8 139.7,74.93 139.7,69.09 133.6,62.99 129.03,62.99 126.49,60.45 126.49,55.88 119.89,49.28 91.95,49.28 87.38,44.7 82.3,44.7 80.26,42.67 79.76,42.67 v71.12,42.67
  Bottom 0.254: v71.12,42.67 67.19,42.67 U$1.PE_12
_PWM_3  (via drill 0.5)  (1 unrouted)
  Top 0.254: 140.72,73.41 140.72,68.58 134.11,61.98 129.54,61.98 127.51,59.94 127.51,55.37 120.4,48.26 92.46,48.26 87.88,43.69 82.8,43.69 80.77,41.66 v70.1,41.66
  Bottom 0.254: v70.1,41.66 65.67,41.66 U$1.PE_14
_START  (via drill 0.5)  (2 unrouted)
  Top 0.254: v42.16,134.11 v14.35,134.11 | U$1.PF_12 63.91,79.64 62.72,80.82 61.74,80.82 61.04,80.13 61.04,79.84 60.45,79.25 v43.18,79.25
  Bottom 0.254: v43.18,79.25 43.18,91.44 42.16,92.46 42.16,119.38 v42.16,134.11 | 9.14,154.96 9.14,153.42 10.16,152.4 12.57,152.4 12.57,135.76 14.22,134.11 v14.35,134.11
_START_RELAY  (via drill 0.5)
  Top 0.254: v127.51,43.18 129.03,41.66 143.26,41.66 U$5.6
  Bottom 0.254: v127.51,43.18 116.84,53.85 96.01,53.85 90.93,58.93 90.93,66.04 74.68,82.3 72.64,82.3 66.33,88.61 64.28,88.61 63.09,89.8 U$1.PC_7 R109.1
_SUPPLY_VALVE  (via drill 0.5)
  Top 0.254: U$3.3 118.87,93.98 v111.76,86.87 | v105.66,92.96 97.03,92.96 81.28,77.22 v38.1,77.22 | v36.7,88.27 27.94,88.27 | 27.94,88.27 U$1.PC_10 | R110.1 27.94,88.27
  Bottom 0.254: v111.76,86.87 v105.66,92.96 | v38.1,77.22 38.1,86.87 v36.7,88.27
ALARM_LED  (via drill 0.5)
  Top 0.254: v16.51,25.4 97.54,25.4 R116.1
  Bottom 0.254: U$1.PG_0 16.48,34.9 v16.51,25.4
AUX5V  (via drill 0.5)  (6 unrouted)
  Top 0.762: v139.7,2.03 2.54,2.03 2.03,2.54 2.03,143.26 3.94,145.16 17.53,145.16 19,143.68 19,140.43 18.91,140.34 C114.+ 21.51,137.73 | v139.7,6.1 139.7,11.43 139.7,19.68 139.83,12.19 C115.1 | C113.1 120.65,56.4 120.65,55.63 v121.92,54.36
  Bottom 0.762: v139.7,6.1 v139.7,2.03 | v121.92,54.36 129.54,54.36 138.18,45.72 138.18,25.78
AUX12V  (via drill 0.5)  (6 unrouted)
  Top 0.762: R307.1 139.19,129.15 139.19,134.62 | 139.19,134.62 140.46,135.89 U$6.VCC 151.81,135.89 U$12.S | 139.19,134.62 139.19,138.68 139.19,140.72 136.65,143.26 v111.25,143.26 | v110.24,147.32 110.24,151.76 81.41,151.76
  Bottom 0.762: v110.24,147.32 111.25,146.3 v111.25,143.26
CAP_CURR  (2 unrouted)
CAP_RELAY  (via drill 0.5)  (1 unrouted)
  Top 0.254: U$5.17 163.07,42.67 v179.83,42.67
  Bottom 0.254: v179.83,42.67 182.33,42.67 186.67,47.01 193.68,47.01 196.57,44.12 196.57,42.32 196.6,42.29 196.6,40.39 194.56,38.35 191.79,38.35
CAP_VOLT  (1 unrouted)
CHARGE_RELAY  (1 unrouted)
  Top 0.254: U$5.15 160.02,40.64 180.72,40.64 186,35.31
DEBUG_LED  (via drill 0.5)
  Top 0.254: v18.92,26.42 98.54,26.42 R117.1
  Bottom 0.254: U$1.PG_1 v18.92,26.42
ESTOP_1  (via drill 0.35, 0.5)
  Top 0.254: H2_SENSOR.P$3 191.79,110.74 195.58,110.74 197.1,112.27 197.1,117.35 195.07,119.38 186.94,119.38 v186.44,118.87 | v179.83,109.73 180.85,110.74 v185.93,110.74 | v52.83,7.62 55.37,5.08 v75.69,5.08 | U$1.PB_12 61.84,94.49 v51.82,94.49
  Bottom 0.254: v186.44,118.87 186.44,116.64 186.46,116.61 186.46,113.26 186.44,113.23 186.44,111.25 v185.93,110.74 | v179.83,109.73 179.83,108.71 176.78,105.66 176.78,90.42 170.18,83.82 170.18,6.1 167.13,3.05 154.43,3.05 149.35,8.13 92.96,8.13 87.88,13.21 83.82,13.21 v75.69,5.08 | v52.83,7.62 52.83,40.13 51.82,41.15 v51.82,94.49
ESTOP_2  (via drill 0.35, 0.5)
  Top 0.254: H2_SENSOR.P$4 189.98,109.73 181.36,109.73 v180.85,109.22 | v51.82,7.11 54.86,4.06 v76.2,4.06 | U$1.PB_13 62.11,97.54 v51.82,97.54
  Bottom 0.254: v180.85,109.22 180.85,108.2 177.8,105.16 177.8,89.92 171.2,83.31 171.2,5.59 167.64,2.03 153.92,2.03 148.84,7.11 92.46,7.11 87.38,12.19 84.33,12.19 v76.2,4.06 | v51.82,7.11 51.82,39.62 50.8,40.64 50.8,96.52 v51.82,97.54
FAN1_PWR  (via drill 0.35)  (2 unrouted)
  Top 0.762: FANS_1.P$1 191.03,137.67 187.45,137.67 185.93,136.14 184.4,136.14 182.88,137.67 v169.98,137.67
  Bottom 0.762: v158.75,134.62 160.91,134.62 163.96,137.67 | 163.96,137.67 v169.98,137.67 | 165.35,139.06 163.96,137.67
FAN2_PWR  (via drill 0.35)  (2 unrouted)
  Top 0.762: FANS_1.P$4 189.98,133.86 185.17,133.86 182.37,136.65 v171.12,136.65
  Bottom 0.762: v163.83,134.62 166.24,134.62 168.28,136.65 v171.12,136.65 171.12,139
FAN3_PWR  (via drill 0.35, 0.5)  (2 unrouted)
  Top 0.762: v172.34,135.64 v181.86,135.64
  Bottom 0.762: v181.86,135.64 181.86,147.83 180.85,148.84 180.85,150.88 185.65,155.68 FANS_2.P$1 | v168.91,134.62 170.43,134.62 171.45,135.64 v172.34,135.64 172.97,136.27
FANS_GATE  (4 unrouted)
FANS_SWITCH_ALL  (via drill 0.5)  (1 unrouted)
  Top 0.254: U$3.18 v162.56,93.98
  Bottom 0.254: v162.56,93.98 v162.56,120.4
FC3V3  (via drill 0.35, 0.5)  (13 unrouted)
  Top 0.254: 99.06,118.36 v103.63,118.36 | 3.05,85.72 3.05,114.3 4.57,115.82 37.59,115.82 | 3.05,85.72 3.05,12.19 4.57,10.67 10.16,10.67 12.19,8.64 12.19,4.57 13.72,3.05 v79.76,3.05 | v94.49,5.08 124.46,5.08 v124.46,11.18 | v103.63,111.25 v95.25,111.25 92.96,111.25 88.39,115.82 81.79,115.82 | 5.59,85.73 9.14,85.73 9.21,85.8 | 5.59,85.73 3.05,85.73 3.05,85.72 | 37.59,115.82 81.79,115.82 | C104.+ 81.79,117.49 81.79,115.82 | C103.1 124.41,26.28 v124.46,26.23 | v37.59,117.35 37.59,115.82 | C101.1 5.84,85.98 5.59,85.73
  Bottom 0.254: v79.76,3.05 80.77,2.03 86.36,2.03 89.41,5.08 v94.49,5.08 | v103.63,118.36 v103.63,111.25 103.63,99.57 | v124.46,26.23 v124.46,11.18 | R220.2 38.72,118.48 v37.59,117.35
FC5V  (via drill 0.35, 0.5, 1)  (13 unrouted)
  Top 0.762: R101.1 C118.1 v154.06,61.33 154.94,60.45 U$5.20 R104.2 | U$3.20 156.86,99.06 R102.2 v159.5,98.69 v159.51,98.68 | R103.1 C119.1 140.46,99.06 141.73,97.79 v148.72,97.79 | 78.74,133.1 C106.+ | v12.7,131.32 14.48,133.1 52.58,133.1 | R104.2 v160.02,58.42 170.18,58.42 179.83,48.77 198.12,48.77 | v198.12,67.06 198.12,98.55 199.14,99.57 v199.14,121.41 | v83.82,161.04 84.84,162.05 v164.08,162.05 | 78.74,133.1 v78.74,128.52 79.16,128.1 | 52.58,133.1 78.74,133.1 | 198.12,48.77 v198.12,61.47 | 198.12,48.77 198.12,40.64 197.89,40.41 | C105.1 9.03,81.14 | R104.2 | v12.7,82.04 12.7,81.15 11.81,80.26 | 50.93,135.57 50.93,134.75 52.58,133.1
  Bottom 0.762: v160.02,58.42 160.02,93.98 159.51,94.49 v159.51,98.68 | v198.12,61.47 v198.12,67.06 | v199.14,121.41 201.17,123.44 201.17,161.04 200.15,162.05 v164.08,162.05 | v78.74,128.52 83.82,133.6 83.82,144.78 | v83.82,161.04 83.82,144.78 | v148.72,97.79 152.4,97.79 U$3.20 | v12.7,131.32 v12.7,82.04 | 74.17,144.78 83.82,144.78
FC12V  (via drill 0.35, 0.5, 1)  (14 unrouted)
  Top 0.762: 192.81,16.28 193.06,16.03 195.56,16.03 199.02,19.49 C109.1 201.68,27.42 v201.68,96.52 | 138.06,116.1 R304.1 141.62,118.25 v142.24,118.87 142.24,117.97 R303.1 143.51,116.7 U$16.VCC | 138.06,116.1 136.69,116.1 134.88,114.3 U$14.VCC | v196.6,96.52 v160.53,96.52 | 88.79,144.27 90.93,144.27 v93.47,146.81 | v93.47,159 94.49,160.02 v142.75,160.02 | v147.83,116.84 148.34,116.33 154.69,116.33 | 154.69,116.33 156.97,116.33 | v142.37,125.73 U$11.VCC v147.83,125.73 151.81,125.73 U$15.S | C110.1 138.06,116.33 138.06,116.1 | v160.53,116.33 156.97,116.33 | v144.27,142.75 157.48,142.75 | 157.48,142.75 162.56,142.75 | 167.64,142.75 C108.1 | C111.1 156.97,116.33 | R308.1 154.69,116.33 | v147.83,129.54 148.78,130.49 U$13.S | U$17.S 148.65,120.33 v147.83,119.38 | 157.48,142.75 157.48,137.84 | 162.56,142.75 162.56,137.84 | 167.64,142.75 167.64,137.84 | 162.56,142.75 167.64,142.75
  Bottom 0.762: v201.68,96.52 v196.6,96.52 | v93.47,146.81 v93.47,159 | v142.75,160.02 144.27,158.5 v144.27,142.75 147.83,139.19 v147.83,129.54 v147.83,125.73 v147.83,119.38 v147.83,116.84 | v142.37,125.73 142.24,125.6 v142.24,118.87 | v160.53,96.52 v160.53,116.33
FC_CURR  (3 unrouted)
  Top 0.254: 65.14,92.71 U$1.PA_5 63.91,92.33 62.72,91.15 49.5,91.15
FC_VOLT  (1 unrouted)
FCC_RELAY  (1 unrouted)
  Top 0.254: U$5.18 164.59,43.69 180.47,43.69 184.76,39.39
FCTEMP_1  (via drill 0.35, 0.5)  (2 unrouted)
  Top 0.254: v181.86,87.38 v176.78,87.38 | v176.78,75.18 175.26,73.66 147.32,73.66 v143.51,69.85 120.9,47.24 92.96,47.24 88.39,42.67 v83.82,42.67 | v83.82,24.38 v73.66,24.38 | v13.72,15.75 20.32,9.14 v71.63,9.14 | U$1.PF_3 v13.72,62.87
  Bottom 0.254: 191.03,89.41 188.98,89.41 186.94,87.38 v181.86,87.38 | v176.78,87.38 v176.78,75.18 | v83.82,42.67 v83.82,24.38 | v13.72,15.75 v13.72,62.87 | v71.63,9.14 73.66,11.18 v73.66,24.38 | 142.63,68.97 v143.51,69.85
FCTEMP_2  (via drill 0.35, 0.5)  (2 unrouted)
  Top 0.254: v181.86,86.36 v177.8,86.36 | v177.8,74.68 175.77,72.64 147.83,72.64 v140.72,65.53 121.41,46.23 93.47,46.23 88.9,41.66 v84.84,41.66 | v84.84,23.37 v74.68,23.37 | v72.64,8.13 v56.9,8.13 | v56.9,62.87 U$1.PF_4
  Bottom 0.254: 188.7,86.36 v181.86,86.36 | v177.8,86.36 v177.8,74.68 | v84.84,41.66 v84.84,23.37 | v56.9,8.13 v56.9,62.87 | v72.64,8.13 74.68,10.16 v74.68,23.37
FROM_BLUE  (via drill 0.5)  (1 unrouted)
  Top 0.254: 133.22,18.29 86.36,18.29 81.28,13.21 v39.12,13.21 | U$1.PD_2 20.7,82.3 v39.12,82.3
  Bottom 0.254: v39.12,13.21 v39.12,82.3
FROM_OPEN  (via drill 0.5)  (1 unrouted)
  Top 0.254: v76.2,106.17 v23.88,106.17 | v22.86,69.6 21.21,67.95 U$1.PD_6
  Bottom 0.254: v76.2,106.17 76.2,93.47 89.92,79.76 | v23.88,106.17 22.86,105.16 v22.86,69.6
GND  (via drill 0.5)  (327 unrouted)
  other vias: 19.68,145.41 28.7,142.49 34.04,130.56 21.84,130.56 67.56,119.38 89.92,119.38 132.08,135.13 132.08,141.73 116.33,135.13 105.66,145.8 106.17,135.13 123.95,123.95 113.28,123.95 146.3,110.24 137.16,110.24 122.94,110.24 46.74,7.11 32.51,11.68 32.51,21.34 46.74,20.83 46.74,33.53 32.51,33.53 70.61,61.98 70.61,51.82 70.61,37.08 92.46,21.84 101.6,23.88 119.89,23.88 74.68,8.64 78.23,14.73 130.56,19.81 130.56,14.22 122.94,14.22 113.79,14.22 173.74,24.89 159.51,24.89 159.51,34.54 173.74,34.54 141.73,13.72 149.86,12.19 149.86,2.03 161.54,7.11 187.96,11.18 187.96,17.27 187.96,23.88 180.34,7.11 181.86,34.54 181.86,24.89 163.07,61.47 163.07,65.02 163.07,55.88 163.07,51.31 151.38,40.64 150.88,54.36 140.72,53.34 132.08,47.24 110.74,67.56 110.74,64.52 109.73,73.15 109.73,78.74 116.84,78.74 101.6,74.68 101.6,82.3 130.56,84.84 130.56,77.22 139.7,96.52 139.7,89.41 131.57,89.41 131.57,96.52 116.33,107.7 108.2,107.7 70.61,94.49 74.17,88.9 87.88,90.42 97.54,87.88 69.6,101.6 69.6,97.54 56.9,102.11 56.9,93.47 78.74,89.41 69.09,80.26 140.72,122.94 140.72,133.1 160.02,139.7 149.86,139.7 168.15,129.54 168.15,123.44 179.32,139.19 179.32,134.11 179.32,130.56 189.99,149.35 177.29,149.35 165.1,149.35 167.13,159 152.4,156.46 164.08,149.35 166.12,149.35 174.24,119.89 174.24,115.82 174.24,111.76 187.45,6.6 195.07,9.14 180.34,10.67 90.42,126.49 86.36,126.49 86.36,120.9 86.36,132.08 116.33,57.4 116.33,51.82 110.24,57.4 103.63,57.4 164.59,89.41 158.5,89.41 33.02,114.3 33.02,117.35 25.91,117.35 25.91,114.3 18.8,114.3 18.8,117.35 11.18,117.35 11.18,114.3 152.91,23.37 148.34,17.78 140.72,25.4 145.8,30.48 138.68,49.28 140.72,38.1 171.7,94.49 165.61,94.49 165.61,98.55 171.7,98.55 183.9,71.12 185.93,73.15 174.75,76.2 172.72,76.2 165.1,76.2 163.07,76.2 131.06,69.09 134.62,72.64 136.65,70.1 133.1,67.06 127,74.68 101.09,155.96 114.3,155.96 122.94,155.96 135.13,155.96 15.24,149.35 37.08,151.38 48.77,119.38 195.07,98.55 185.42,98.55 80.77,73.15 71.12,73.15 181.86,65.02 181.86,61.47 158.5,101.6 158.5,110.24 164.59,112.78 99.57,100.58 99.57,96.52 197.61,132.59 197.61,128.02 67.56,130.56 119.38,116.33 113.28,116.33 80.26,136.65 89.92,136.65
  pour Top: -0.13,163.96 203.45,163.96 203.45,-0.25 -0.25,-0.25 -0.25,163.96
  pour Bottom: -0.25,163.96 203.45,163.96 203.45,-0.25 -0.25,-0.25
H2_OK  (via drill 0.5)
  Top 0.254: v178.82,110.24 180.36,111.78 H2_SENSOR.P$2 | v53.85,8.13 55.88,6.1 v75.18,6.1 | v52.83,60.33 v52.84,60.33 U$1.PB_6
  Bottom 0.254: v178.82,110.24 178.82,109.22 175.77,106.17 175.77,90.93 169.16,84.33 169.16,6.6 166.62,4.06 154.94,4.06 149.86,9.14 93.37,9.14 89.81,12.7 89.81,12.8 88.39,14.22 83.31,14.22 v75.18,6.1 | v53.85,8.13 53.85,40.64 53.51,40.97 53.46,40.97 52.83,41.6 v52.83,60.33
HUMID_RST  (via drill 0.5)  (1 unrouted)
  Top 0.254: U$1.PC_6 62.23,104.39 62.99,105.16 v79.76,105.16
  Bottom 0.254: v79.76,105.16 79.76,97.54 80.77,96.52
I2C1_SCL  (1 unrouted)
  Top 0.254: 65.53,104.14 64.77,103.38 U$1.PB_8
I2C1_SDA  (1 unrouted)
  Top 0.254: 81.79,101.6 80.26,103.12 67.94,103.12 U$1.PB_9
INTERRUPT
  Bottom 0.254: U$1.PH_1 U$1.PH_0
MOTOR_CURR  (3 unrouted)
  Top 0.254: 65.14,90.17 U$1.PA_6 64.34,90.22 62.72,88.61 61.74,88.61 60.57,89.78 60.11,90.23 49.12,90.23 48.42,90.93
MOTOR_RELAY  (1 unrouted)
  Top 0.254: U$5.16 161.54,41.66 181.1,41.66 185.42,37.34 189.98,37.34
MOTOR_VOLT  (1 unrouted)
N$1  (1 unrouted)
N$2
  Top 0.254: R305.2 136.77,135.89 U$6.ANODE
N$3  (1 unrouted)
N$4  (1 unrouted)
N$5  (1 unrouted)
N$7  (1 unrouted)
N$8  (2 unrouted)
N$9
  Top 0.254: R301.2 135.52,124.09 U$11.ANODE
N$10
  Top 0.254: R103.2 U$3.1
N$11
  Top 0.254: R101.2 148.98,63.13 147.32,61.47 U$5.1
N$12  (2 unrouted)
N$13
  Top 0.254: R302.2 136.26,105.04 U$14.ANODE
N$14
  Top 0.254: R306.2 143.88,106.31 U$16.ANODE
N$15  (2 unrouted)
N$16
  Top 0.254: R116.2 D1.A
N$17
  Top 0.254: R117.2 D2.A
N$18  (via drill 0.5)
  Top 0.254: U$25.1 111.76,26.02 111.76,29.46 110.74,30.48 v73.66,30.48 | v73.66,58.17 R118.2
  Bottom 0.254: v73.66,30.48 v73.66,58.17
N$19  (via drill 0.5)
  Top 0.254: U$25.2 111,24.13 110.24,24.89 110.24,28.96 109.73,29.46 v72.64,29.46 | R119.2 v37.08,77.47 | v37.08,23.37 v72.64,23.37
  Bottom 0.254: v72.64,29.46 v72.64,23.37 | v37.08,77.47 v37.08,23.37
N$20  (via drill 0.5)
  Top 0.254: U$25.3 110.21,22.38 109.22,23.37 109.22,28.45 v71.63,28.45 | R120.2 v38.1,74.93 | v38.1,22.35 v71.63,22.35
  Bottom 0.254: v71.63,28.45 v71.63,22.35 | v38.1,74.93 v38.1,22.35
N$21  (1 unrouted)
N$22  (1 unrouted)
N$23  (1 unrouted)
N$24  (1 unrouted)
N$30  (via drill 0.5)
  other vias: 197.61,14.22
OE*  (via drill 0.5)  (4 unrouted)
  Top 0.254: v161.04,95.5 157.87,95.5 157.23,96.15 | v161.54,105.79 161.56,105.78 161.56,106.69 163.07,108.2 166.2,108.2 Q1.3 | 158.87,55.88 v161.04,55.88
  Bottom 0.254: v161.04,55.88 v161.04,95.5 161.54,96.01 v161.54,105.79
OLED_CLK  (via drill 0.35, 0.5)  (1 unrouted)
  Top 0.254: v89.92,57.4 81.28,57.4 70.23,46.35 63.5,46.35 U$1.PE_2B 57.44,49.89 41.49,49.89 39.56,51.82 v31.88,51.82 | v105.16,52.83 107.95,55.63 | v28.45,53.47 20.83,53.47 U$1.PE_2A
  Bottom 0.254: v89.92,57.4 90.93,57.4 95.5,52.83 v105.16,52.83 | v31.88,51.82 30.23,53.47 v28.45,53.47
OLED_MISO  (via drill 0.5)  (1 unrouted)
  Top 0.254: v98.55,66.04 70.48,66.04 66.04,61.59 v36.06,61.59 | v36.07,50.8 35.43,50.16 28.19,50.16 28.19,50.17 U$1.PE_5
  Bottom 0.254: 109.25,60.94 109.25,60.99 108.49,61.75 108.43,61.75 105.66,64.52 100.08,64.52 v98.55,66.04 | v36.06,61.59 v36.06,50.81 v36.07,50.8
OLED_MOSI  (via drill 0.5)  (1 unrouted)
  Top 0.254: U$1.PE_6 25.79,47.63 v26.92,48.77 | v27.94,68.58 28.62,69.27 92.28,69.27 v92.46,69.09
  Bottom 0.254: 102.62,62.48 99.06,62.48 v92.46,69.09 | v26.92,48.77 26.92,67.56 v27.94,68.58
OLED_SEL  (via drill 0.5)  (1 unrouted)
  Top 0.254: 114.33,58.45 114.33,58.39 107.75,51.82 94.49,51.82 91.95,54.36 82.8,54.36 v72.64,44.2 | U$1.PE_4 39.24,52.71 41.66,50.29 59.82,50.29 61.21,48.9 v67.94,48.9
  Bottom 0.254: v72.64,44.2 v67.94,48.9
OPEN_RST  (via drill 0.5)  (1 unrouted)
  Top 0.254: v78.23,108.2 v22.86,108.2
  Bottom 0.254: v78.23,108.2 78.23,94.49 87.88,84.84 | v22.86,108.2 20.83,106.17 20.83,71.63 19.69,70.49 U$1.PD_7
OUTPUT_1
  Top 0.254: R302.1 141.11,100.58 147.44,100.58 149.99,98.03 149.99,90.23 153.67,86.55 U$3.15
OUTPUT_1_ENET  (via drill 0.35, 0.5)
  Top 0.762: v154.05,128.65 154.05,127.33 153.34,126.62 v152.53,126.62 | U$15.D v151.13,124.46
  Bottom 0.762: v154.05,128.65 152.4,130.05 152.4,131.06 153.92,132.59 153.92,159 155.96,161.04 | 155.96,161.04 156.97,162.05 160.53,162.05 165.6,156.98 VALVES.P$5 | v151.13,124.46 152.53,125.86 v152.53,126.62 | D5.C 155.96,161.04
OUTPUT_1_GATE  (via drill 0.5)
  Top 0.254: R304.2 140.21,114.81 U$14.VO | v146.05,116.33 146.05,121.92 147.57,123.44 152.06,123.44 U$15.G
  Bottom 0.254: v146.05,116.33 141.73,116.33 U$14.VO
OUTPUT_2  (via drill 0.5)
  Top 0.254: R306.1 155.45,103.63 v155.96,103.12
  Bottom 0.254: v155.96,103.12 155.96,84.33 155.45,83.82 U$3.14
OUTPUT_2_ENET  (via drill 0.5)
  Top 0.762: v155.96,152.4 v152.91,152.4 | U$17.D 152.91,119.38 153.67,120.14 v153.67,124.97
  Bottom 0.762: v153.67,124.97 153.67,127.51 151.38,129.54 151.38,131.57 152.91,133.1 v152.91,152.4 151.91,153.4 D3.C | VALVES.P$7 169.42,156.21 170.69,154.94 170.69,153.42 169.67,152.4 v155.96,152.4
OUTPUT_2_GATE  (via drill 0.5)
  Top 0.254: U$16.VO 150.25,112.64 R308.2 | v153.42,118.36 153.35,118.43 U$17.G
  Bottom 0.254: U$16.VO 150.88,114.3 153.42,116.84 v153.42,118.36
PRESSURE_1  (via drill 0.5)  (2 unrouted)
  Top 0.254: v55.88,30.48 67.31,30.48 71.37,34.54 138.18,34.54 154.43,18.29 | U$1.PB_1 v55.88,67.94 55.5,67.56
  Bottom 0.254: v55.88,30.48 v55.88,67.94
PRESSURE_2  (via drill 0.35, 0.5)  (2 unrouted)
  Top 0.254: v12.7,29.46 67.82,29.46 71.88,33.53 137.67,33.53 154.94,16.26 | U$1.PC_0 v12.7,67.94
  Bottom 0.254: v12.7,67.94 v12.7,37.08 v12.7,29.46
PRESSURE_3  (via drill 0.5)  (2 unrouted)
  Top 0.254: v54.86,28.45 68.33,28.45 72.39,32.51 137.16,32.51 155.45,14.22 | U$1.PC_2 v54.87,65.41 v54.86,65.41 54.48,65.02
  Bottom 0.254: v54.86,65.41 v54.86,28.45
PRESSURE_4  (via drill 0.35, 0.5)  (2 unrouted)
  Top 0.254: 155.96,12.19 136.65,31.5 72.9,31.5 68.97,27.55 68.83,27.43 54.1,27.43 53.21,28.45 v11.68,28.45 | v11.68,65.41 U$1.PC_3
  Bottom 0.254: v11.68,28.45 v11.68,34.54 v11.68,65.41
PURGE_VALVE  (via drill 0.5)
  Top 0.254: R301.1 134.25,121.92 134.11,121.92 v132.08,119.89 | v151,92.71 151,91.57 U$3.16
  Bottom 0.254: v151,92.71 140.46,92.71 132.08,101.09 v132.08,119.89
PURGE_VALVE_ENET  (via drill 0.35, 0.5)
  Top 0.762: v152.4,157.99 v154.94,157.99 | U$13.D 152.91,129.54 153.67,130.3 v153.67,130.81
  Bottom 0.762: VALVES.P$3 163.58,156.97 160.02,161.04 157.48,161.04 154.94,158.5 v154.94,157.99 154.94,132.08 v153.67,130.81 | D6.C v152.4,157.99
PURGE_VALVE_GATE  (via drill 0.5)
  Top 0.254: U$13.G 152.13,127.49 151.89,127.25 v143.38,127.25 | U$11.VO 144.78,117.97 R303.2
  Bottom 0.254: v143.38,127.25 143.38,122.05 U$11.VO
PWM_1  (via drill 0.5)
  Top 0.254: U$3.13 v178.82,81.28 | v184.4,124.46 v187.45,124.46
  Bottom 0.254: v178.82,81.28 178.82,104.65 181.86,107.7 181.86,121.92 v184.4,124.46 | v187.45,124.46 193.55,130.56 193.55,133.11 FANS_1.P$3
PWM_2  (via drill 0.5)
  Top 0.254: U$3.12 153.92,78.74 155.45,80.26 v179.83,80.26
  Bottom 0.254: v179.83,80.26 179.83,104.14 182.88,107.19 182.88,121.41 187.96,126.49 187.96,130.56 189.23,131.83 FANS_1.P$6
PWM_3  (via drill 0.5)
  Top 0.254: FANS_2.P$3 187.91,156.21 189.2,157.5 192.3,157.5 194.08,155.72 199.64,150.16 v199.64,146.3 | U$3.11 153.92,76.2 156.97,79.25 v180.85,79.25 | v183.9,120.9 185.93,122.94 197.61,122.94 199.64,124.97 v199.64,142.24
  Bottom 0.254: v180.85,79.25 180.85,103.63 183.9,106.68 183.9,113.24 183.88,113.26 183.88,116.61 183.9,116.63 v183.9,120.9 | v199.64,142.24 v199.64,146.3
RUN_LED
  Top 0.254: U$1.PG_9 65.14,58.17 R118.1
RX_OUT_RS232  (1 unrouted)
RX_OUT_TTL  (1 unrouted)
SHUT_LED
  Top 0.254: U$1.PG_2 21.46,78.11 22.1,77.47 R119.1
START_LED
  Top 0.254: U$1.PG_3 21.46,75.57 22.1,74.93 R120.1
START_RELAY  (1 unrouted)
  Top 0.254: U$5.14 158.5,39.62 180.34,39.62 187.96,31.88 191.39,31.88 193.55,34.04 193.55,35.56 192.78,36.33
STOP  (via drill 0.5)  (2 unrouted)
  Top 0.254: 186.71,117.86 v177.8,117.86 171.32,117.86 168.02,114.55 | v74.68,7.11 v57.91,7.11 | 168.02,114.55 168.02,111.01 168.02,111.17 Q1.1 | R115.2 168.02,114.8 168.02,114.55 | U$1.PB_5 61.79,87.69 61.36,87.69 60.66,88.39
  Bottom 0.254: v74.68,7.11 82.8,15.24 88.9,15.24 93.98,10.16 150.37,10.16 155.45,5.08 166.12,5.08 168.15,7.11 168.15,84.84 174.75,91.44 174.75,106.68 177.8,109.73 v177.8,117.86 | v57.91,7.11 58.93,8.13 58.93,86.87 61.84,86.87 U$1.PB_5
SUPPLY_VALVE  (via drill 0.5)
  Top 0.254: R305.1 133.97,131.43 v131.06,128.52
  Bottom 0.254: v131.06,128.52 131.06,100.58 141.48,90.17 152.4,90.17 U$3.17
SUPPLY_VALVE_ENET  (via drill 0.35, 0.5)
  Top 0.762: VALVES.P$1 161.52,155.93 161.01,155.93 159.64,154.56 159.64,152.53 158.37,151.26 153.29,151.26 151.89,149.86 v151.89,146.3 | v151.13,134.62 U$12.D
  Bottom 0.762: 151.89,143.76 v151.89,146.3 | 151.89,143.76 151.89,137.16 151.13,136.4 v151.13,134.62 | D4.C 151.89,143.76
SUPPLY_VALVE_GATE
  Top 0.254: R307.2 142.24,128.27 U$6.VO 147.07,133.1 151.89,133.1 152.13,133.33 U$12.G
TACH_1  (via drill 0.5)
  Top 0.254: v134.11,103.12 99.57,103.12 97.03,105.66 89.41,105.66 84.33,110.74 61.98,110.74 v60.45,109.22
  Bottom 0.254: FANS_1.P$2 186.67,132.59 178.94,132.59 177.67,132.59 171.2,126.49 156.97,126.49 156.46,125.98 156.46,108.2 151.38,103.12 v134.11,103.12 | U$1.PB_15 60.45,101.73 v60.45,109.22
TACH_2  (via drill 0.5)
  Top 0.254: FANS_1.P$5 194.32,132.85 197.61,136.14 197.61,141.73 196.09,143.26 v192.53,143.26 | v188.47,143.26 187.45,142.24 v179.32,142.24 | v134.11,104.14 100.08,104.14 97.54,106.68 94.49,106.68 89.41,111.76 61.47,111.76 58.93,109.22 v22.35,109.22
  Bottom 0.254: v192.53,143.26 191.52,144.27 189.48,144.27 v188.47,143.26 | v179.32,142.24 176.4,139.32 176.4,133.22 170.69,127.51 156.46,127.51 155.45,126.49 155.45,108.71 150.88,104.14 v134.11,104.14 | v22.35,109.22 19.81,106.68 19.81,94.11 U$1.PC_8
TACH_3  (via drill 0.5)
  Top 0.254: v178.82,143.26 v186.44,143.26 | v134.11,105.16 100.58,105.16 98.04,107.7 95,107.7 89.92,112.78 60.96,112.78 58.42,110.24 v24.89,110.24 | v23.88,90.81 U$1.PC_9
  Bottom 0.254: FANS_2.P$2 186.44,154.2 v186.44,143.26 | v178.82,143.26 175.26,139.7 175.26,133.6 170.18,128.52 155.96,128.52 154.43,127 154.43,109.22 150.37,105.16 v134.11,105.16 | v24.89,110.24 24.89,105.16 23.88,104.14 v23.88,90.81
TEMP_1  (via drill 0.35, 0.5)  (2 unrouted)
  Top 0.254: 191.79,86.61 194.18,86.61 196.6,89.03 196.6,93.47 194.56,95.5 188.98,95.5 186.94,93.47 186.94,86.36 182.37,81.79 182.37,77.72 176.28,71.63 148.34,71.63 v146.3,69.6 121.92,45.21 93.98,45.21 89.41,40.64 v78.74,40.64 | v78.74,20.32 66.55,20.32 64.52,18.29 27.43,18.29 v24.38,21.34
  Bottom 0.254: v78.74,40.64 v78.74,20.32 | v24.38,21.34 24.38,39.37 22.35,41.4 22.35,43.69 21.34,44.7 21.34,58.55 20.83,59.05 17.65,59.05 16.51,60.2 U$1.PF_5 | 145.68,68.97 v146.3,69.6
TEMP_2  (via drill 0.5)  (2 unrouted)
  Top 0.254: 186.68,82.3 184.4,82.3 183.39,81.28 183.39,77.22 176.78,70.61 148.84,70.61 143.76,65.53 | 143.76,65.53 122.43,44.2 94.49,44.2 89.92,39.62 v79.76,39.62 | v79.76,19.3 67.06,19.3 65.02,17.27 26.92,17.27 v23.37,20.83 | v22.35,40.01 U$1.PF_7 | 143.76,65.53 143.76,65.42
  Bottom 0.254: v79.76,39.62 v79.76,19.3 | v23.37,20.83 23.37,38.86 22.35,39.88 v22.35,40.01
TEMP_3  (via drill 0.35, 0.5)  (2 unrouted)
  Top 0.254: 191.78,84.58 194.31,84.58 196.6,82.3 v196.6,74.68 | v182.37,74.68 177.29,69.6 v149.35,69.6 122.94,43.18 95,43.18 90.42,38.61 v80.77,38.61 | v80.77,18.29 67.56,18.29 65.53,16.26 26.42,16.26 v22.35,20.32 | v21.34,42.55 U$1.PF_8
  Bottom 0.254: v196.6,74.68 v182.37,74.68 | v80.77,38.61 v80.77,18.29 | v22.35,20.32 22.35,38.35 21.34,39.37 v21.34,42.55 | 148.73,68.97 v149.35,69.6
TEMP_4  (via drill 0.35, 0.5)  (2 unrouted)
  Top 0.254: 187.96,81.54 187.96,78.74 177.8,68.58 149.86,68.58 v146.81,65.53 123.44,42.16 95.5,42.16 90.93,37.59 v81.79,37.59 | v81.79,17.27 68.07,17.27 66.04,15.24 25.91,15.24 v21.34,19.81 | v21.34,37.47 U$1.PF_9
  Bottom 0.254: v81.79,37.59 v81.79,17.27 | v21.34,19.81 v21.34,37.47
TEMP_5  (via drill 0.35, 0.5)  (2 unrouted)
  Top 0.254: 191.77,81.03 178.31,67.56 150.37,67.56 v148.34,65.53 123.95,41.15 96.01,41.15 91.44,36.58 v82.8,36.58 | v82.8,16.26 68.58,16.26 66.55,14.22 25.4,14.22 v20.32,19.3
  Bottom 0.254: v82.8,36.58 v82.8,16.26 | v20.32,19.3 20.32,56.52 17.79,56.52 U$1.PF_10 | 148.45,65.42 v148.34,65.53
TO_BLUE  (via drill 0.5)  (1 unrouted)
  Top 0.254: 134.75,17.27 86.87,17.27 81.79,12.19 v40.13,12.19 | U$1.PC_12 19.17,83.31 v40.13,83.31
  Bottom 0.254: v40.13,83.31 v40.13,12.19
TO_JP3  (1 unrouted)
TO_JP4  (1 unrouted)
TO_OPEN  (via drill 0.5)  (1 unrouted)
  Top 0.254: v77.22,107.19 v23.37,107.19
  Bottom 0.254: v77.22,107.19 77.22,93.98 88.9,82.3 | v23.37,107.19 21.84,105.66 21.84,67.06 20.2,65.41 U$1.PD_5
TX_OUT_RS232  (1 unrouted)
TX_OUT_TTL  (1 unrouted)

## Text on the board
tPlace: RS 232 To Motor | Aux5V | FC12V | FC5V | A1 | A2 | A3 | 1. Connect jumper JP3 between pin 1 and pin 2 for E5V / 2. Check that JP1 is removed / 3. Connect the external power source to E5V | 4. Power on the external power supply / 5. Check that the green LED LD6 is turned ON / 6. Connect the PC to the USB connector CN1